# Altium PCB KE_PDB_BMS_ver1.PcbDoc
Units mm, origin at the board's own origin, x right, y up, seen from the top; angles counter-clockwise.
Board outline 60.28 x 59.5 mm, 4 copper layers (L1 [Signal], L2 [GND], L3 [GND], L4 [Power]), stack 1.369 mm thick; 39 components, 28 nets, 158 pads, 35 vias.
Unrouted connection lines stored in the file: 26.
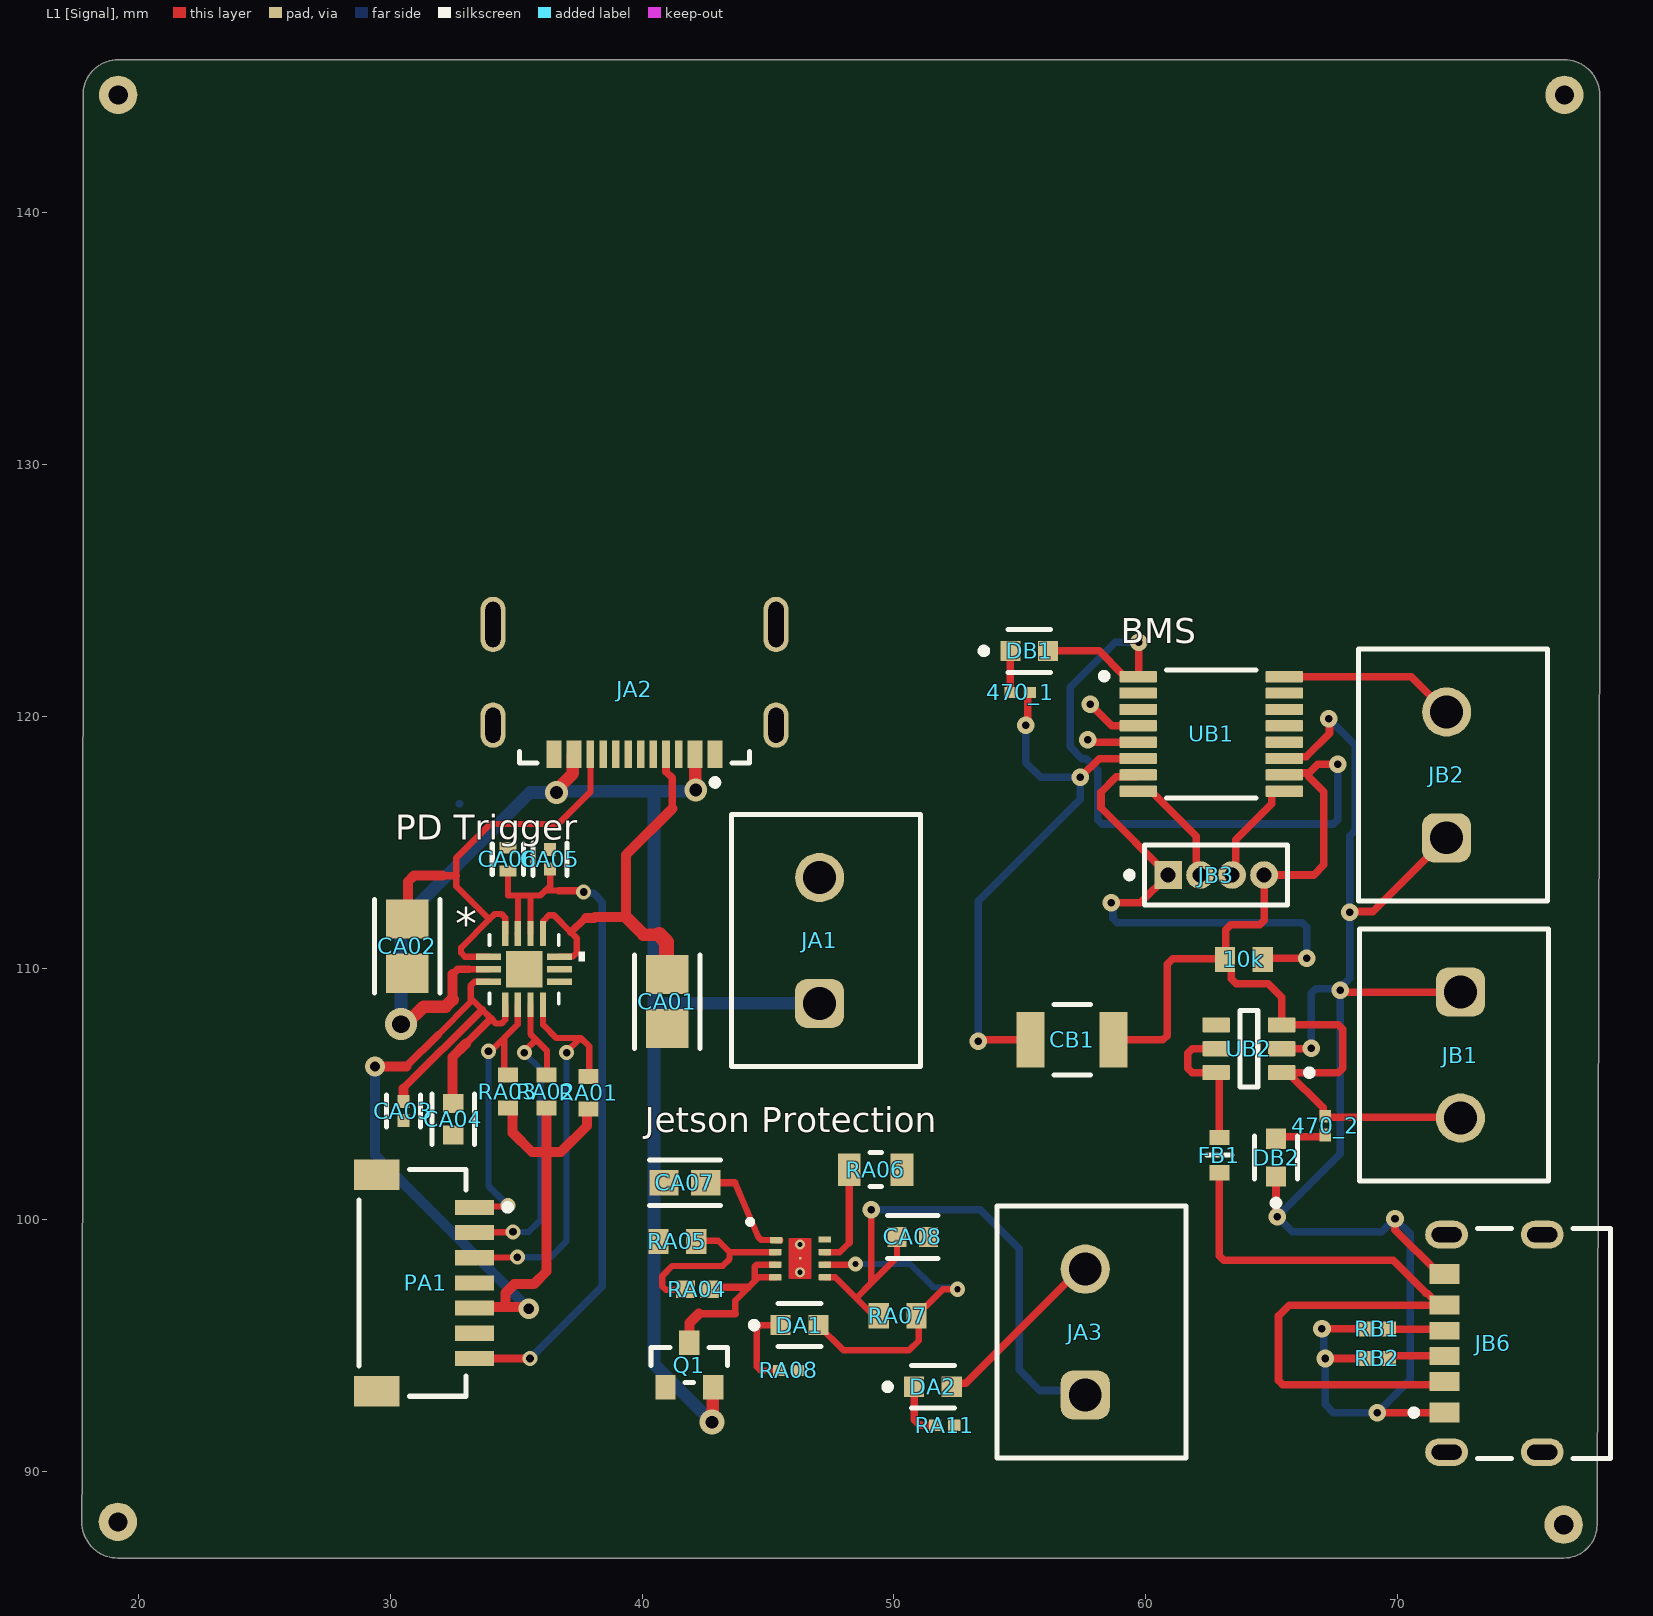
[diagram p0: L1 [Signal] view]
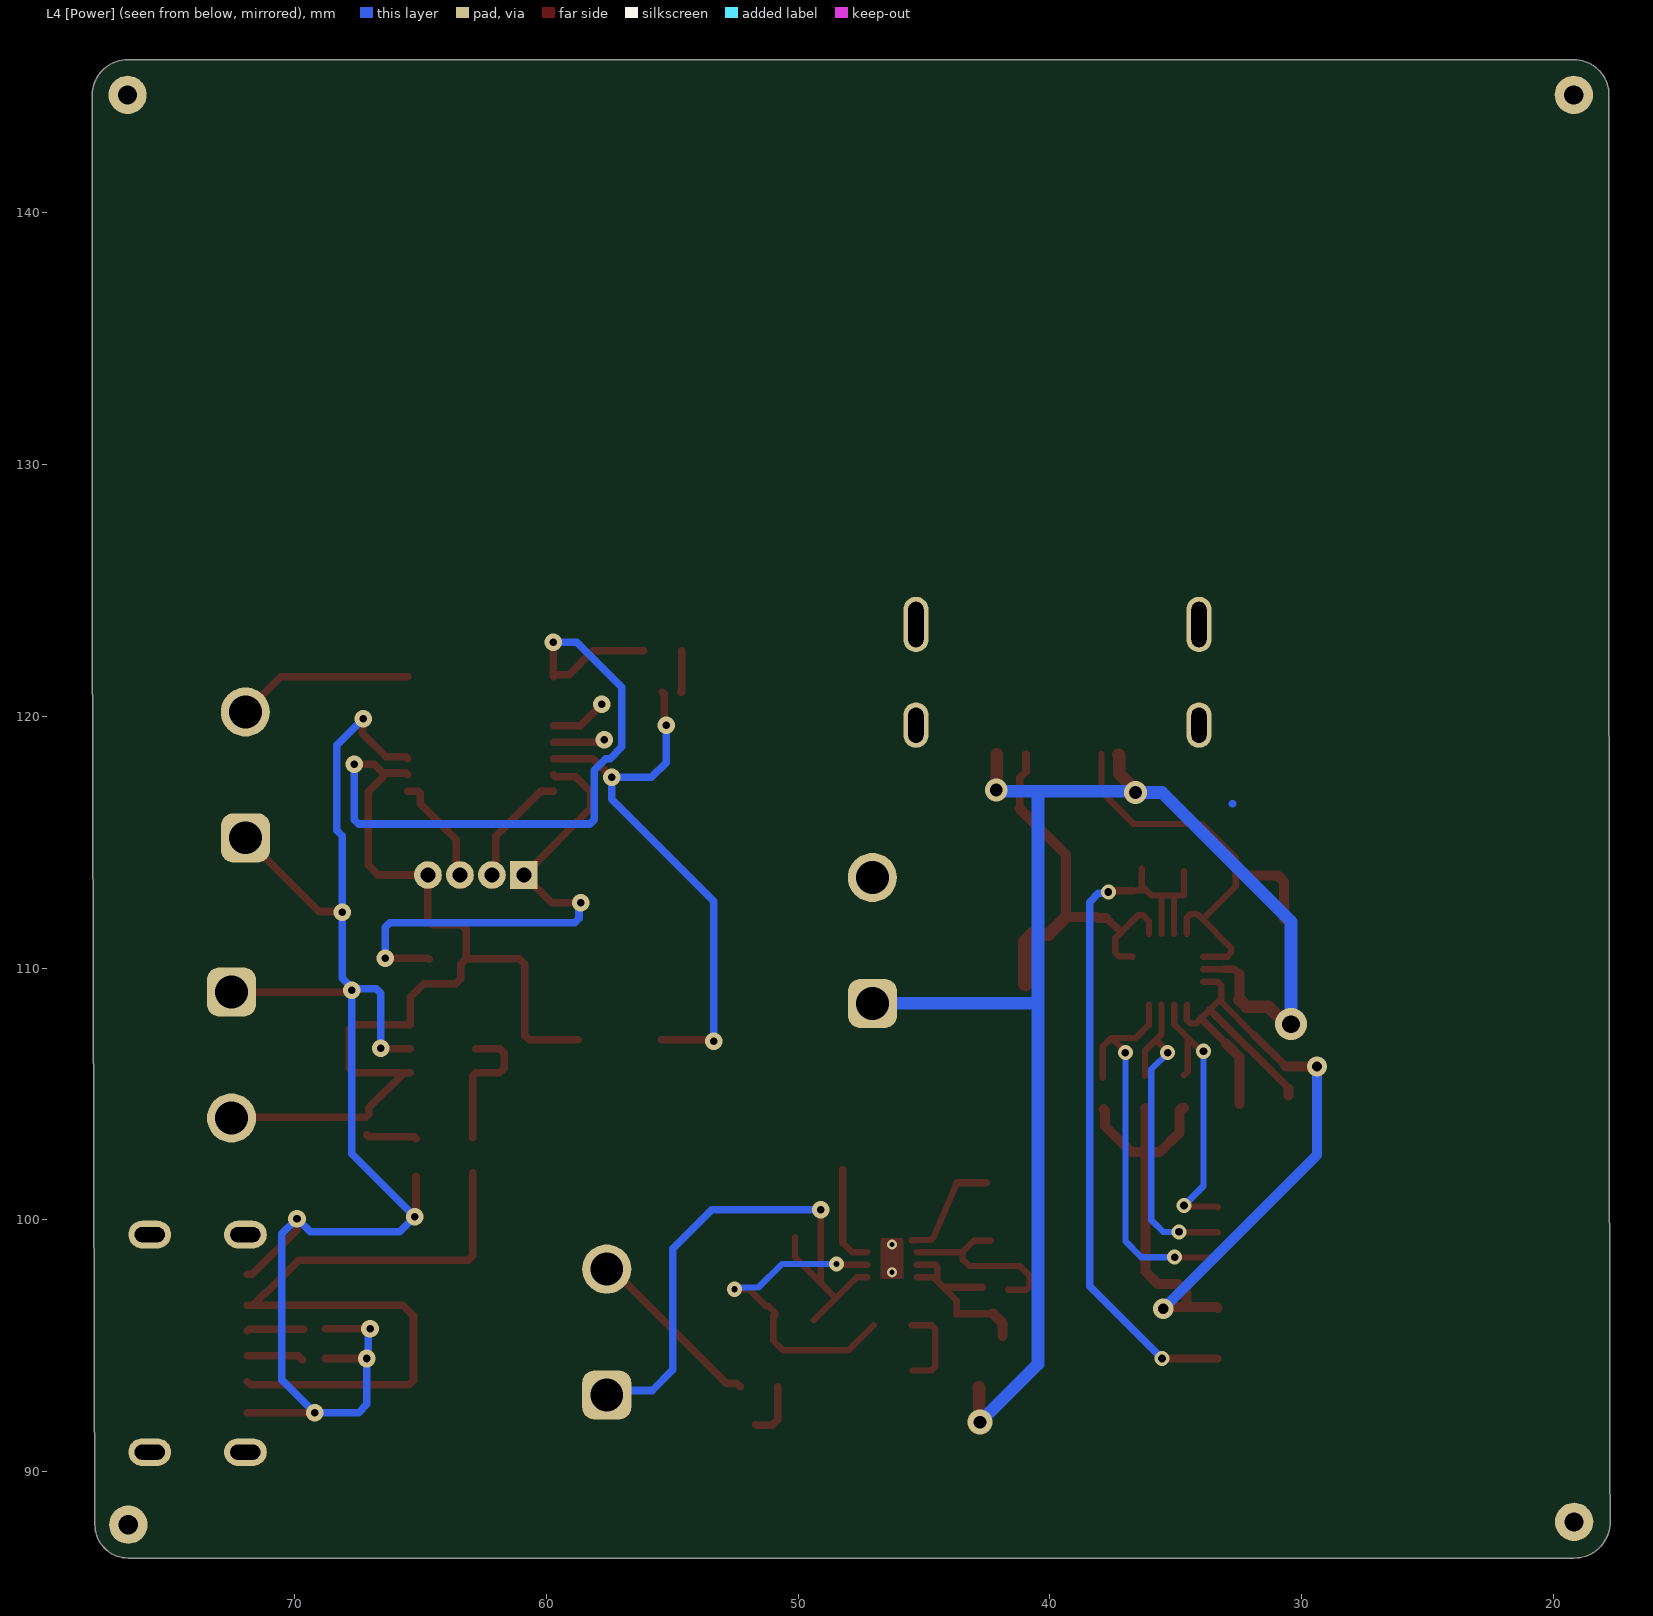
[diagram p1: L4 [Power] view, seen from below]
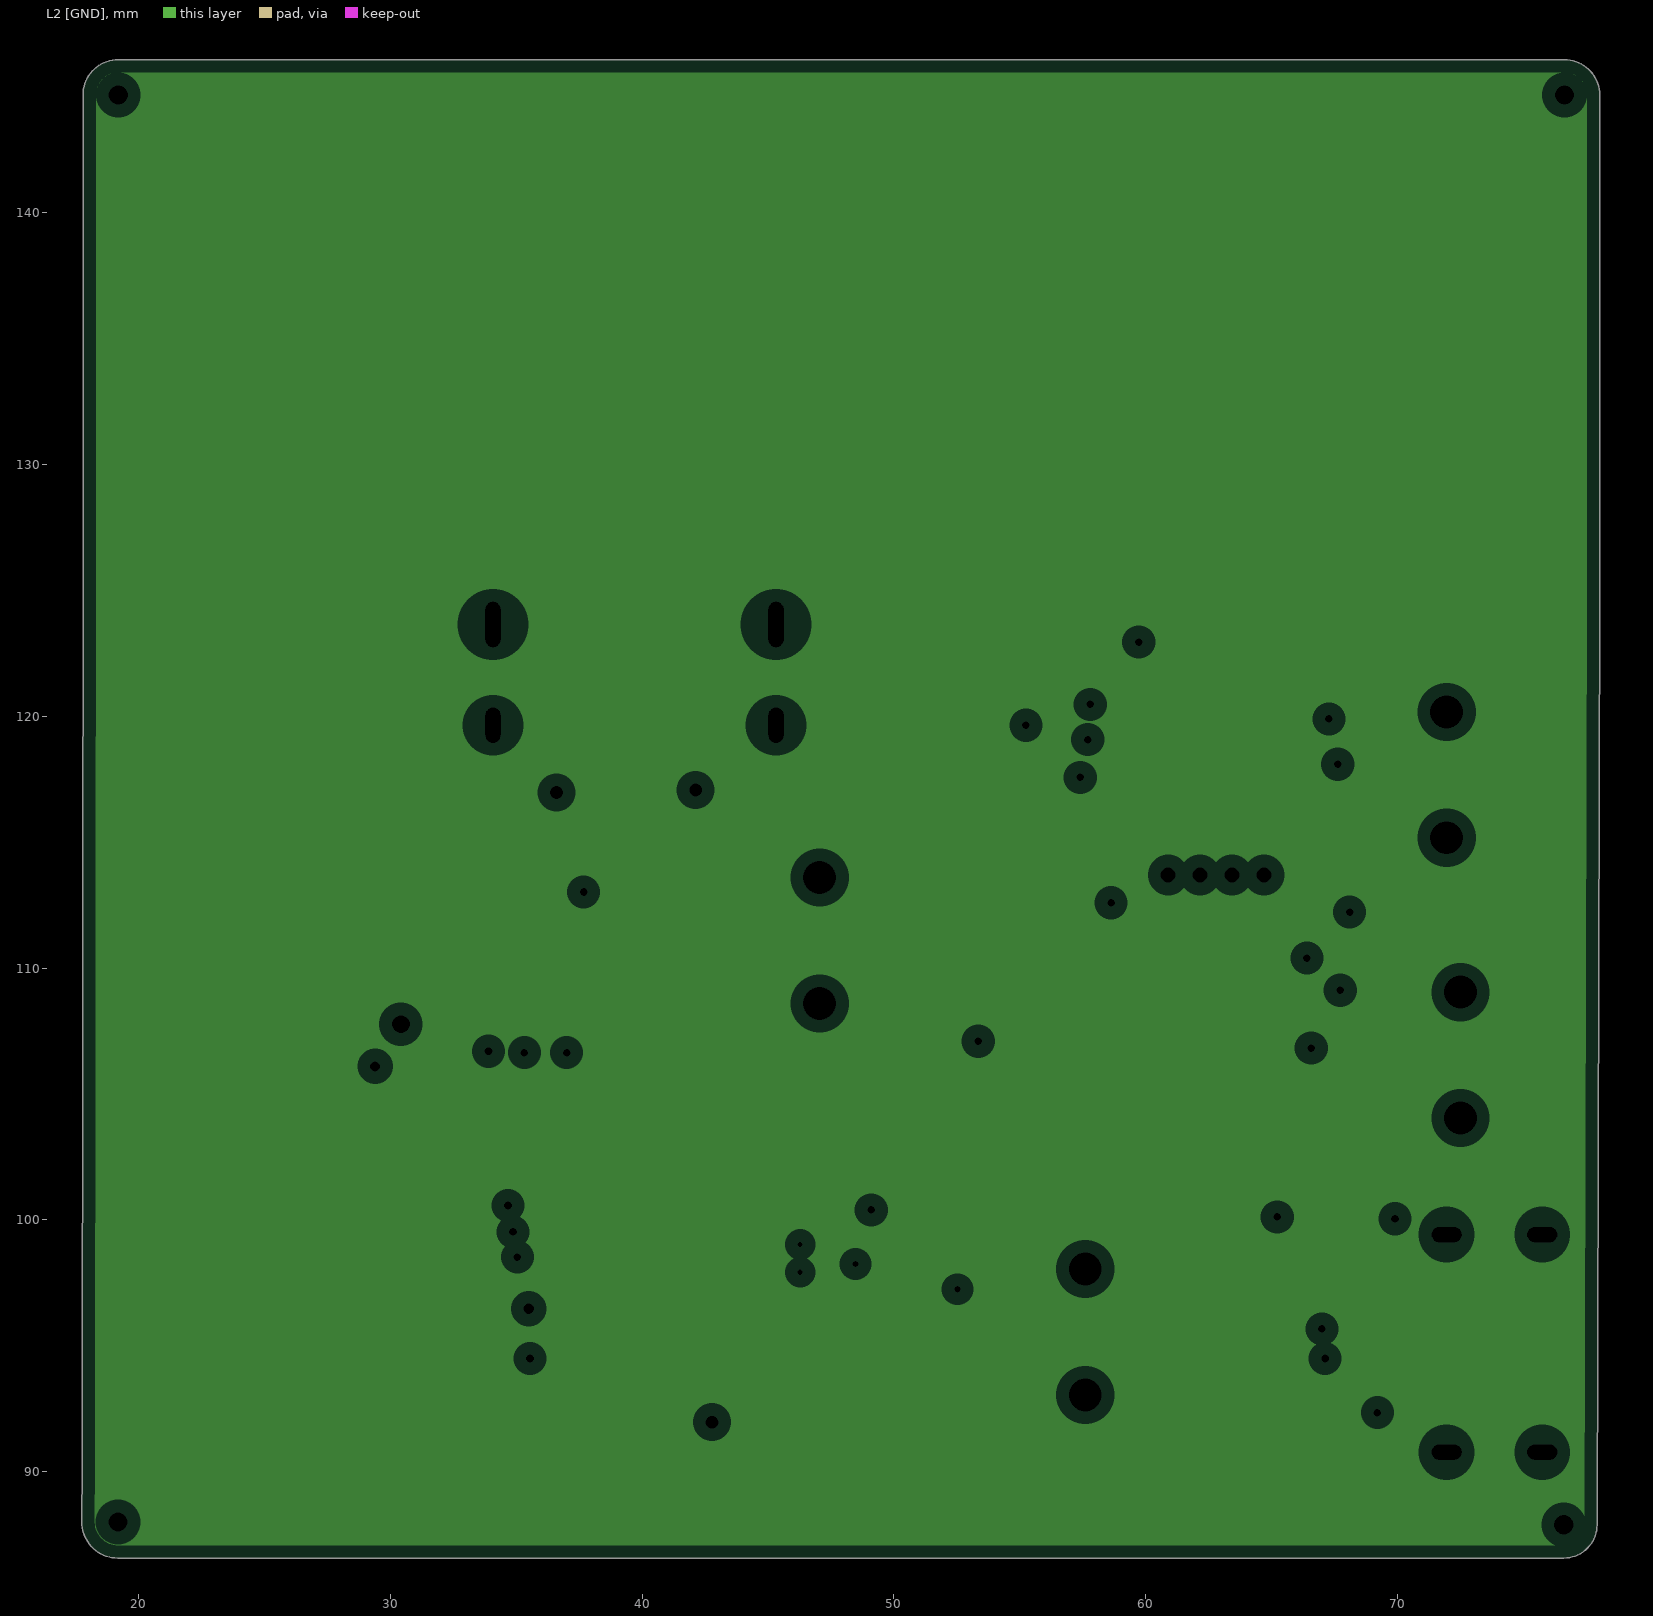
[diagram p2: L2 [GND], clearances drawn from the general rule]
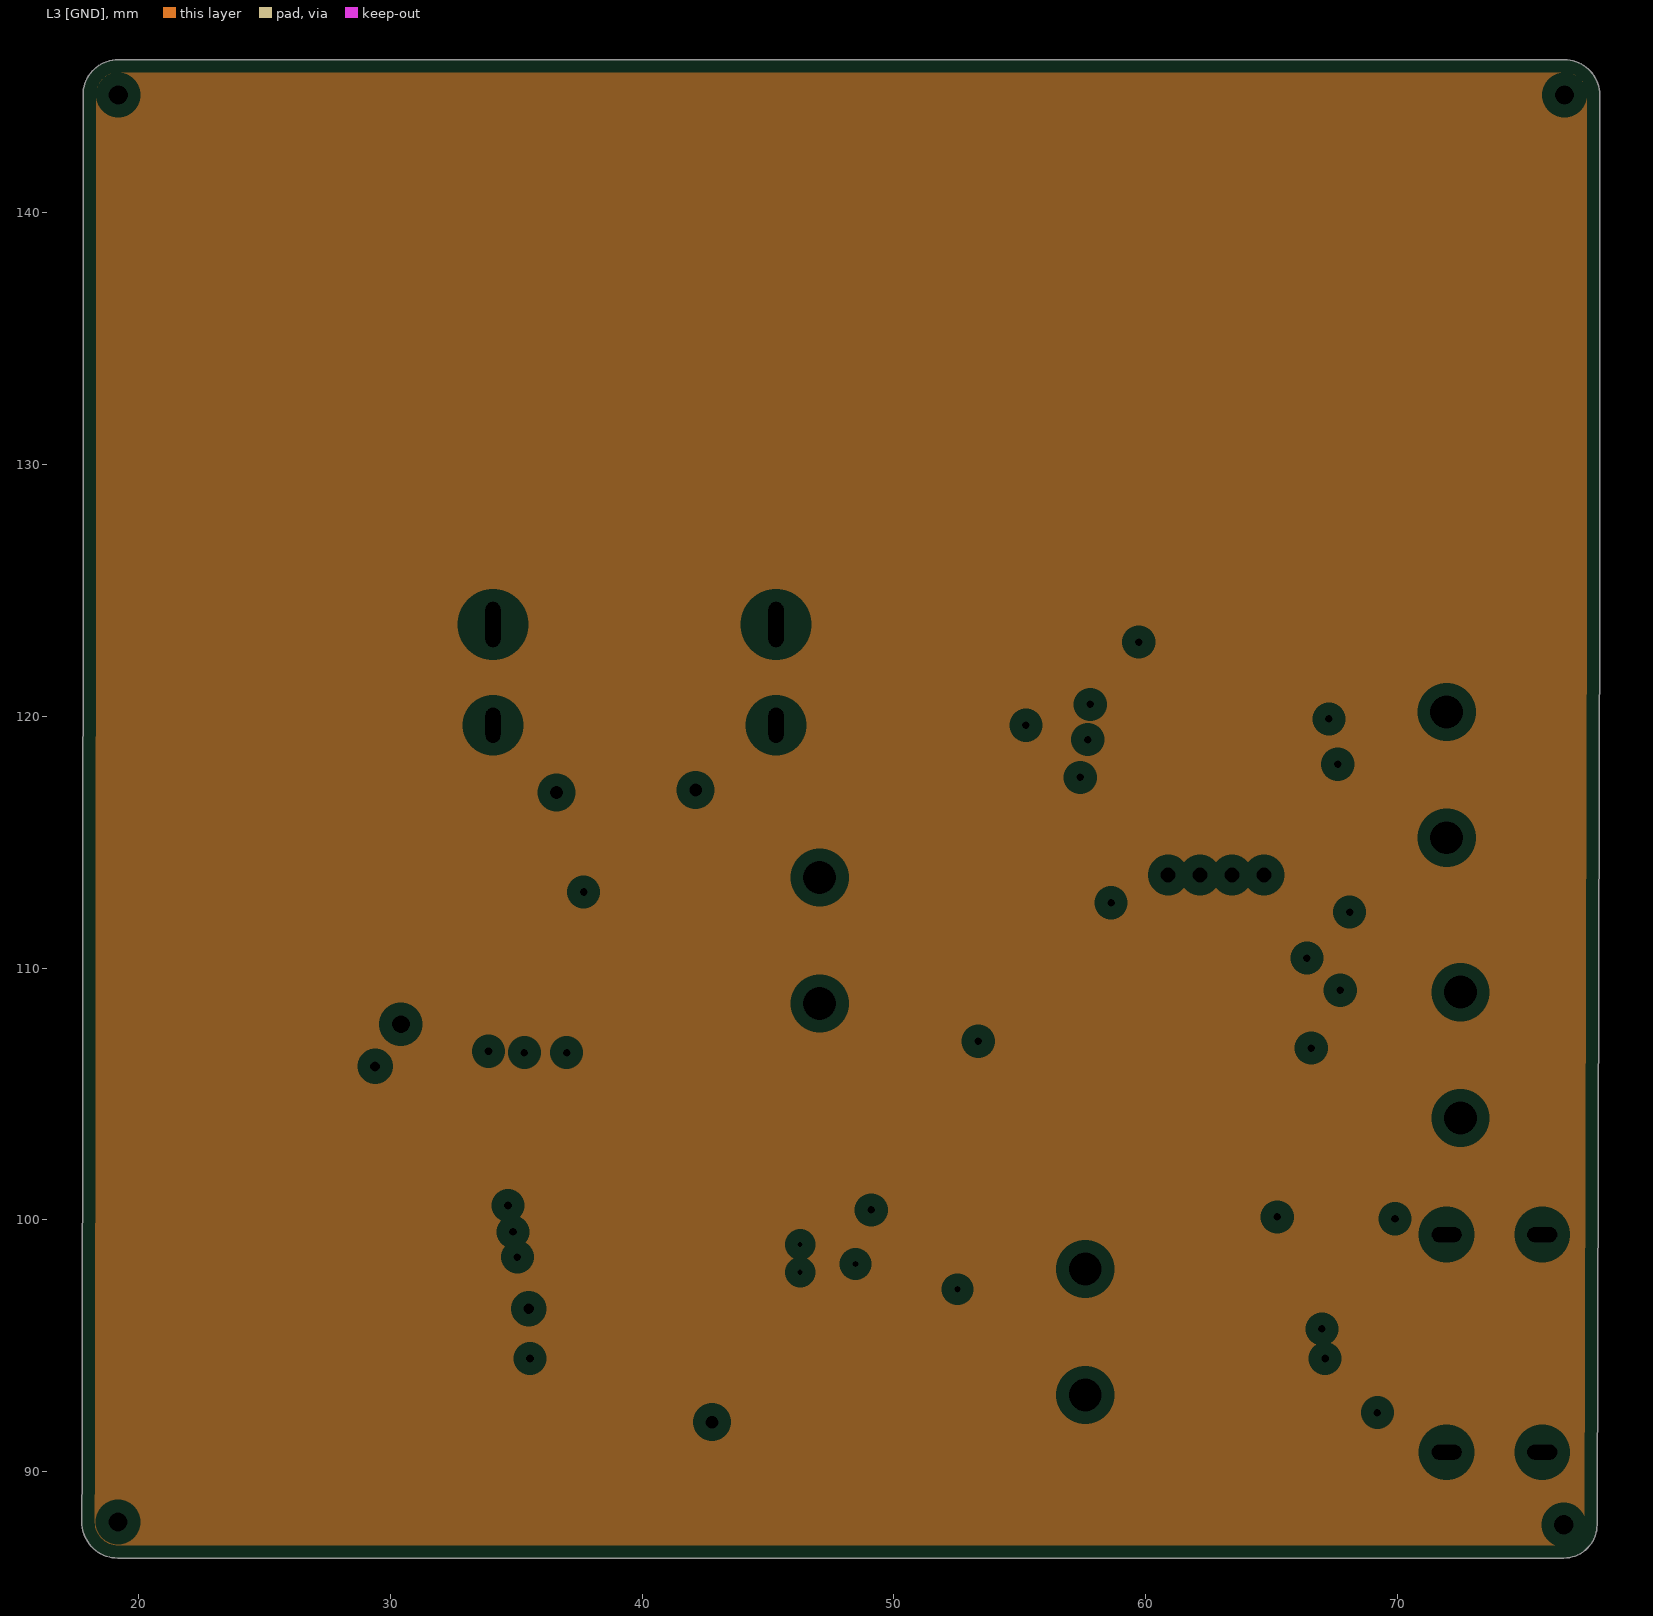
[diagram p3: L3 [GND], clearances drawn from the general rule]
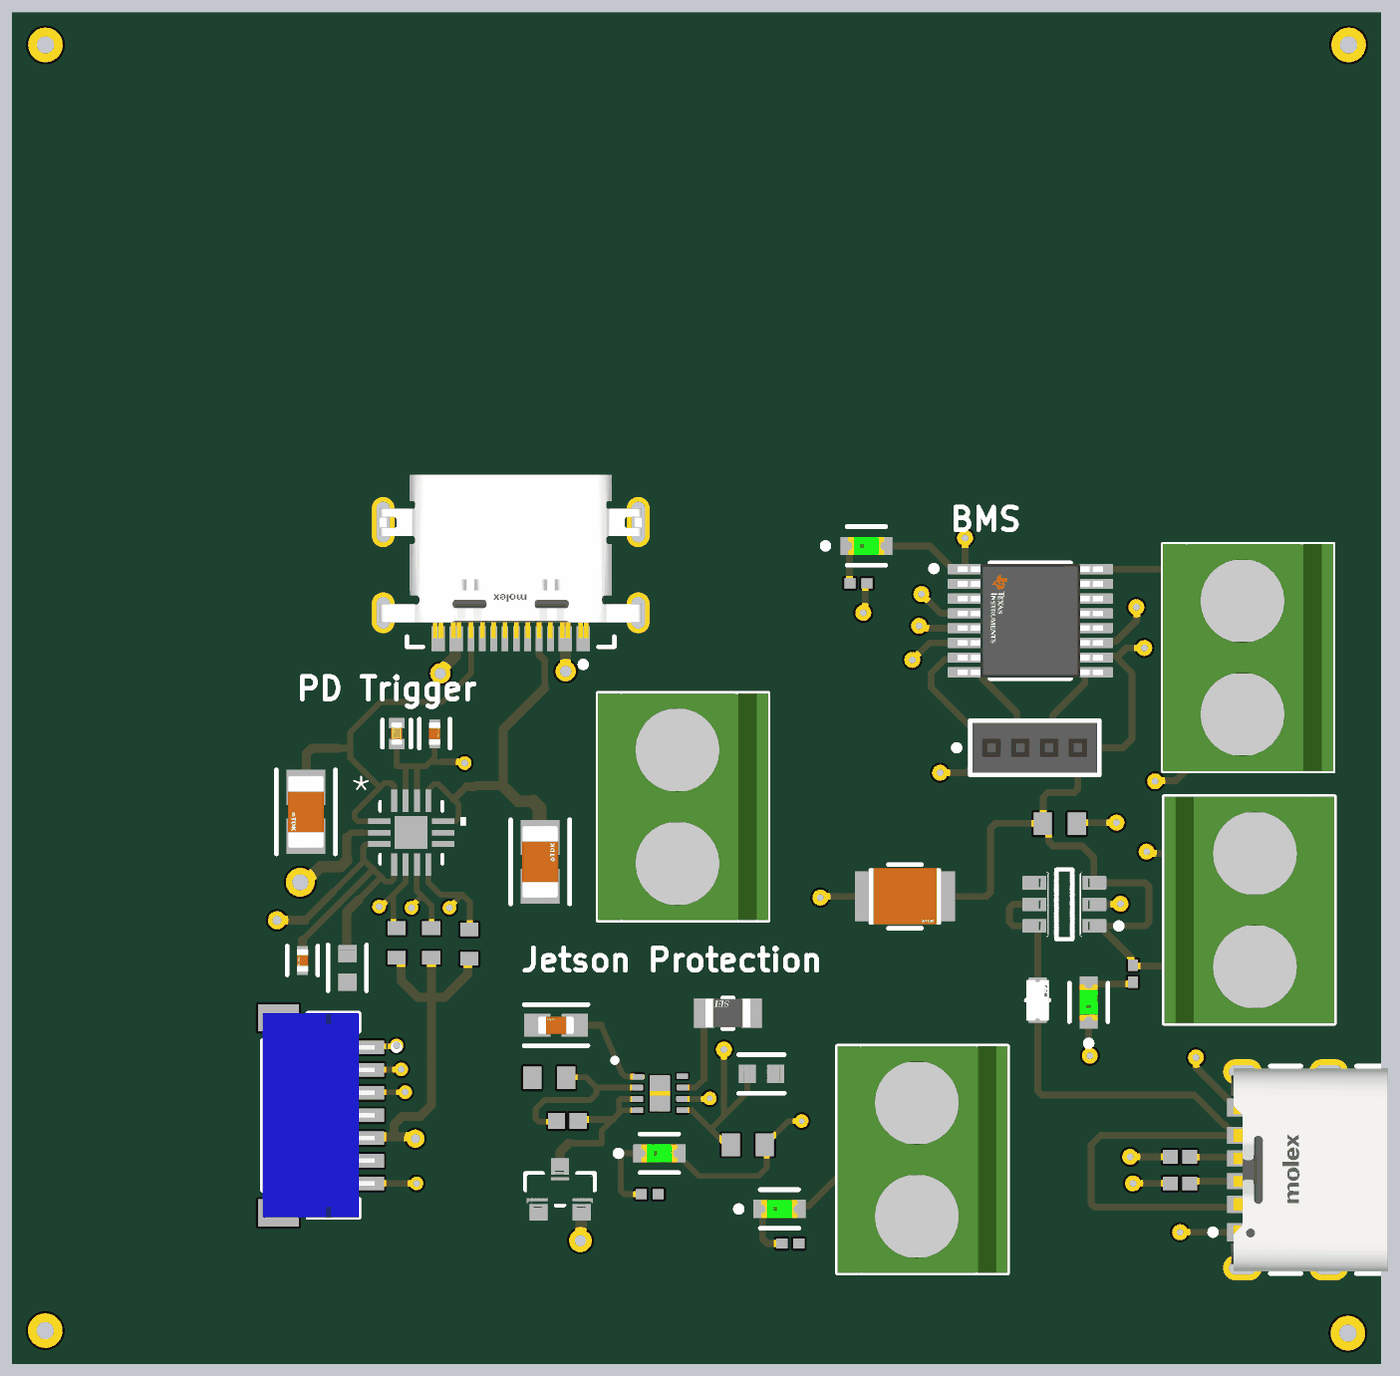
[diagram p4: 3D render of the assembled board from above, using the file's embedded part models]

## Layer stack, top to bottom
Top Solder: solder mask 0.0254, SM-001, Dk 4
L1 [Signal]: signal copper 0.035
Dielectric 1: prepreg 0.1295, PP-017, Dk 4.3
Dielectric 2: prepreg 0.1295, PP-017, Dk 4.3
L2 [GND]: plane copper 0.035
Dielectric 3: core 0.7112, Core-039, Dk 4.8
L3 [GND]: plane copper 0.035
Dielectric 4: prepreg 0.1295, PP-017, Dk 4.3
Dielectric 5: prepreg 0.1295, PP-017, Dk 4.3
L4 [Power]: signal copper 0.035
Bottom Solder: solder mask 0.0254, SM-001, Dk 4

## Board outline
17.747,88.01 17.773,90.177 17.773,90.225 17.798,128.854 17.798,128.855 17.798,144.68 cw(c19.195,144.68) 19.195,146.077 29.35,146.077 29.351,146.077 75.425,146.077 76.63,146.077 cw(c76.63,144.68) 78.027,144.68 78.027,124.53 77.927,87.9 cw(c76.6,87.9) 76.6,86.573 33.1,86.573 19.184,86.573 cw(c19.184,88.01)

## Design rules (kind name [scope] priority, off if disabled: settings)
Clearance [All] p1: gap=0.2 ignorepadtopadclearanceinfootprint=FALSE
PlaneClearance [All] p1: clearance=0.508
PlaneConnect [All] p1: planeconnectstyle=Relief reliefexpansion=0.508 reliefentries=4 reliefconductorwidth=0.254 reliefairgap=0.254
PolygonConnect [All] p1: connectstyle=Direct reliefconductorwidth=0.254 reliefentries=4 polygonreliefangle="90 Angle" airgapwidth=0.254
RoutingVias [All] p1: holewidth=0.711 width=1.27 viastyle="Through Hole" minholewidth=0.711 minwidth=1.27 maxholewidth=0.711 maxwidth=1.27
SolderMaskExpansion [All] p1: expansion=0.102 istentingtop=FALSE
SupplyNets "Schematic Supply Nets" [InNet('GND')] p1: voltage=0.000
UnRoutedNet [All] p1: checkbadconnections=TRUE
Width [All] p1: maxlimit=1 minlimit=0.2 preferedwidth=0.3 minimp=50.000000 maximp=50.000000 favimp=50.000000
27 further rules are at their usual default settings.

## Components (designator, comment, footprint, x,y, rotation, side; value= is the part's Value field where it differs from the comment)
10k "10k" RESC1608X55X25ML10T15 63.9,110.35 r0 top
470_1 "RC0402JR-07470RL" RESC1005X40X25LL05T10 55.025,120.95 r180 top
470_2 "RC0402JR-07470RL" RESC1005X40X25LL05T10 67.125,103.75 r270 top
CA01 "470pF" FP-C3216-085-0_2-IPC_C 41,108.674 r90 top
CA02 "470pF" FP-C3216-085-0_2-IPC_C 30.675,110.875 r270 top
CA03 "0.1uF" FP-CL93-IPC_C 30.525,104.325 r270 top
CA04 "1uF" FP-CL10-IPC_C 32.5,104 r270 top
CA05 "0.1uF" FP-CL93-IPC_C 36.35,114.325 r90 top
CA06 "10uF" FP-CL05A106MP5NUNC-MFG 34.675,114.325 r90 top
CA07 "3.3uF" FP-GRM188-0_1-e0_2_0_5-IPC_A 41.7,101.475 r180 top value=3.3nF
CA08 "1uF" FP-CL10-IPC_C 50.752,99.325 r0 top
CB1 "C3225X5R1E106M250AA" FP-C3225-250-0_4-MFG 57.075,107.15 r0 top
DA1 "LED off = fault" FP-LTST-C190GKT-MFG 46.25,95.825 r0 top
DA2 "LED off=fault" FP-LTST-C190GKT-MFG 51.55,93.375 r0 top
DB1 "LTST-C190GKT" FP-LTST-C190GKT-MFG 55.375,122.6 r0 top
DB2 "LTST-C190GKT" FP-LTST-C190GKT-MFG 65.175,102.475 r90 top
FB1 "3A 6V PTC Fuse" FP-PTSLR06036V300-MFG 62.925,102.575 r270 top
JA1 "691137710002" 691137710002 47.3,111.1 r90 top
JA2 "216990-0001" FP-216990-0001-MFG 39.7,122.5 r180 top
JA3 "691137710002" 691137710002 57.85,95.55 r90 top
JB1 "691137710002" 691137710002 72.25,106.55 r270 top
JB2 "691137710002" 691137710002 72.2,117.675 r90 top
JB3 "LPPB041NFFN-RC" FP-LPPB041NFFN-RC-MFG 62.795,113.7 r0 top
JB6 "217175-0001" FP-217175-0001-MFG 74.9,95.1 r90 top
PA1 "SM07B-SRSS-TB(LF)(SN)" JST-SM07B-SRSS-TB_V 31.4,97.5 r270 top
Q1 "IRLML6402TRPBF" FP-Micro3-MFG 41.875,94.24 r90 top
RA01 "4.7k" RESC1608X55X25LL10T15 37.875,105.05 r90 top value=4.7kOhms
RA02 "4.7k" RESC1608X55X25LL10T15 36.2,105.1 r90 top value=4.7kOhms
RA03 "4.7k" RESC1608X55X25LL10T15 34.675,105.1 r90 top value=4.7kOhms
RA04 "30k" RESC1005X40X25ML10T10 42.2,97.25 r0 top
RA05 "10k" RESC1608X55X25ML10T15 41.4,99.15 r0 top
RA06 "510" FP-RMCF0805-MFG 49.275,102 r180 top value=510R
RA07 "10k" RESC1608X55X25ML10T15 50.15,96.2 r0 top value=10kOhms
RA08 "470" RESC1005X40X25LL05T10 45.825,94.025 r0 top
RA11 "470" RESC1005X40X25LL05T10 52.025,91.85 r0 top
RB1 "5.1k_1" RESC1005X40X25NL10T10 69.2,95.675 r0 top
RB2 "5.1k_2" RESC1005X40X25NL10T10 69.2,94.5 r0 top
UB1 "INA260AIPWR" FP-PW0016A-MFG 62.6,119.3 r0 top
UB2 "TPS22918DBVR" FP-DBV0006A-MFG 64.1,106.8 r180 top

## Footprints (in the part's own frame and the unit in brackets; to place one, negate y for a bottom-side part, rotate by r counter-clockwise, add the part's x,y. Pads: shape width x height; smd on the part's side, far side on the other; paste and mask are expansions set on the pad)
691137710002 [mm] "Horizontal Cable Entry with Pressure Clamp, pitch 5mm, 02p"
  rrect50% 1.95x1.95 hole 1.3: 1(-2.5,0.25)
  round 1.95 hole 1.3: 2(2.5,0.25)
  silkscreen extent -5,-3.75 5,3.75, body extent -5,-3.75 5,3.75, height 11.6
FP-216990-0001-MFG [mm]
  rrect100% 1x1.8 hole 1.4 slot 0.6 at 0 deg paste-2539.97 mask+0: 1(-5.62,2.85) 2(5.62,2.85)
  rrect100% 1x2.2 hole 1.8 slot 0.6 at 0 deg paste-2539.97 mask+0: 3(-5.62,-1.15) 4(5.62,-1.15)
  rect 0.6x1.1 smd paste+0 mask+0: A1-B12(-3.2,4) A4-B9(-2.4,4) A9-B4(2.4,4) A12-B1(3.2,4)
  rect 0.3x1.1 smd paste+0 mask+0: A5(-1.25,4) A6(-0.25,4) A7(0.25,4) A8(1.25,4) B5(1.75,4) B6(0.75,4) B7(-0.75,4) B8(-1.75,4)
  silkscreen extent -4.57,3.9 4.57,5.25, body extent -6.22,-3.45 6.22,4.65, height 0.25
FP-217175-0001-MFG [mm]
  rrect100% 1.1x1.7 hole 1.2 slot 0.6 at 0 deg paste-2539.97 mask+0: 1(-4.32,2.95) 2(4.32,2.95) 3(-4.32,-0.85) 4(4.32,-0.85)
  rect 0.7x1.2 smd paste+0 mask+0: A5(-0.5,3.03) B5(0.5,3.03)
  rect 0.76x1.2 smd paste+0 mask+0: A9(1.52,3.03) B9(-1.52,3.03)
  rect 0.8x1.2 smd paste+0 mask+0: A12(2.75,3.03) B12(-2.75,3.03)
  silkscreen extent -4.57,-3.55 4.57,4.37, body extent -4.97,-3.65 4.97,3.9, height 0.25
FP-C3216-085-0_2-IPC_C [mm]
  rect 1.554x1.706 smd paste+0 mask+0: 1(-1.076,0) 2(1.076,0)
  silkscreen extent -1.85,-1.3 1.85,1.3, body extent -1.95,-1 1.95,1, height 0.25
FP-C3225-250-0_4-MFG [mm]
  rect 1.1x2.2 smd paste+0 mask+0: 1(-1.65,0) 2(1.65,0)
  silkscreen extent -0.72,-1.4 0.72,1.4, body extent -2.3,-1.5 2.3,1.5, height 0.25
FP-CL05A106MP5NUNC-MFG [mm]
  rect 0.45x0.675 smd paste+0 mask+0: 1(-0.463,0) 2(0.463,0)
  silkscreen extent -0.6,-0.63 0.6,0.63, body extent -0.79,-0.45 0.79,0.45, height 0.25
FP-CL10-IPC_C [mm]
  rect 0.758x0.812 smd paste+0 mask+0: 1(-0.627,0) 2(0.627,0)
  silkscreen extent -1.01,-0.85 1.01,0.85, body extent -1.11,-0.55 1.11,0.55, height 0.25
FP-CL93-IPC_C [mm]
  rect 0.515x0.472 smd paste+0 mask+0: 1(-0.379,0) 2(0.379,0)
  silkscreen extent -0.64,-0.67 0.64,0.67, body extent -0.74,-0.38 0.74,0.38, height 0.25
FP-DBV0006A-MFG [mm]
  rrect17% 1.1x0.6 smd paste+0 mask+0: 1(-1.3,0.95) 2(-1.3,0) 3(-1.3,-0.95) 4(1.3,-0.95) 5(1.3,0) 6(1.3,0.95)
  silkscreen extent -2.53,-1.53 0.35,1.53, body extent -1.95,-1.78 1.95,1.78, height 0.25
FP-GRM188-0_1-e0_2_0_5-IPC_A [mm]
  rect 1.159x1.012 smd paste+0 mask+0: 1(-0.827,0) 2(0.827,0)
  silkscreen extent -1.41,-0.91 1.41,0.91, body extent -1.91,-1.01 1.91,1.01, height 0.25
FP-LPPB041NFFN-RC-MFG [mm]
  rect 1.1x1.1 hole 0.6 paste-2539.97 mask+0: 1(-1.905,0)
  round 1.1 hole 0.6 paste-2539.97 mask+0: 2(-0.635,0) 3(0.635,0) 4(1.905,0)
  silkscreen extent -3.56,-1.2 2.84,1.2, body extent -2.94,-1.3 2.94,1.3, height 0.25
FP-LTST-C190GKT-MFG [mm]
  rect 0.8x0.8 smd paste+0 mask+0: 1(-0.75,0) 2(0.75,0)
  silkscreen extent -1.92,-0.85 0.85,0.85, body extent -1.25,-0.55 1.25,0.55, height 0.25
FP-Micro3-MFG [mm]
  rect 0.972x0.802 smd paste+0 mask+0: 1(-0.885,0.95) 2(-0.885,-0.95) 3(0.885,0)
  silkscreen extent -0.7,-1.52 0.7,1.52, body extent -1.47,-1.87 1.47,1.87, height 0.25
FP-PTSLR06036V300-MFG [mm]
  rect 0.6x0.8 smd paste+0 mask+0: 1(-0.7,0) 2(0.7,0)
  silkscreen extent 0,-0.5 0,0.5, body extent -1.1,-0.6 1.1,0.6, height 0.25
FP-PW0016A-MFG [mm]
  rrect22% 1.5x0.45 smd paste+0 mask+0: 1(-2.9,2.275) 2(-2.9,1.625) 3(-2.9,0.975) 4(-2.9,0.325) 5(-2.9,-0.325) 6(-2.9,-0.975) 7(-2.9,-1.625) 8(-2.9,-2.275) 9(2.9,-2.275) 10(2.9,-1.625) 11(2.9,-0.975) 12(2.9,-0.325) 13(2.9,0.325) 14(2.9,0.975) 15(2.9,1.625) 16(2.9,2.275)
  silkscreen extent -4.37,-2.55 1.78,2.55, body extent -3.75,-2.8 3.75,2.8, height 0.25
FP-RMCF0805-MFG [mm]
  rect 0.9x1.3 smd paste+0 mask+0: 1(-1.05,0) 2(1.05,0)
  silkscreen extent -0.23,-0.67 0.23,0.67, body extent -1.6,-0.77 1.6,0.77, height 0.25
JST-SM07B-SRSS-TB_V [mm] "SMD, 7-Leads, Body 9x4.25mm, Pitch 1mm"
  rect 0.6x1.55 smd: 1(-3,1.938) 2(-2,1.938) 3(-1,1.938) 4(0,1.938) 5(1,1.938) 6(2,1.938) 7(3,1.938)
  rect 1.2x1.8 smd: MP1(-4.3,-1.937) MP2(4.3,-1.937)
  silkscreen extent -4.5,-2.64 4.5,3.39, body extent -4.5,-2.64 4.5,2.31, height 2.96
RESC1005X40X25LL05T10 [mm] "Chip Resistor, 2-Leads, Body 1.00x0.50mm, IPC High Density"
  rect 0.5x0.45 smd: 1(-0.375,0) 2(0.375,0)
  body extent -0.53,-0.27 0.53,0.28, height 0.4
RESC1005X40X25ML10T10 [mm] "Chip Resistor, 2-Leads, Body 1.00x0.50mm, IPC Low Density"
  rect 0.75x0.7 smd: 1(-0.475,0) 2(0.475,0)
  body extent -0.55,-0.3 0.55,0.3, height 0.4
RESC1005X40X25NL10T10 [mm] "Chip Resistor, 2-Leads, Body 1.00x0.50mm, IPC Medium Density"
  rect 0.65x0.6 smd: 1(-0.425,0) 2(0.425,0)
  body extent -0.55,-0.3 0.55,0.3, height 0.4
RESC1608X55X25LL10T15 [mm] "Chip Resistor, 2-Leads, Body 1.60x0.80mm, IPC High Density"
  rect 0.6x0.8 smd: 1(-0.65,0) 2(0.65,0)
  body extent -0.85,-0.45 0.85,0.45, height 0.55
RESC1608X55X25ML10T15 [mm] "Chip Resistor, 2-Leads, Body 1.60x0.80mm, IPC Low Density"
  rect 0.8x1 smd: 1(-0.75,0) 2(0.75,0)
  body extent -0.85,-0.45 0.85,0.45, height 0.55

## Part data
10k RA05 RA07: library part CMP-2000-05022-1, "Resistor, 10 KOhm, +/- 5%, 100 mW, -55 to 155 degC, 0603 (1608 Metric), RoHS, Tape and Reel", Case Code - in=0603, Case Code - mm=1608, Manufacturer=Yageo, Operating Temperature Range=-55Cto+155C, Package Description="2-Pin Surface Mount Device, Body 1.6 x 0.8 mm", Package Reference=603, Power Rating=100mW, Resistance=10kOhms, Temperature Coefficient=100PPM/C, Tolerance=5%, Voltage Rating=50V, Datasheet URL=http://www.farnell.com/datasheets/443971.pdf, Datasheet Version="Rev. 4, 04/2009", Manufacturer URL=http://www.yageo.com/, Packaging=Reel, Product=ThickFilmResistorsGeneralPurpose, Series=RC, Termination Style=SMD/SMT
470_1 470_2: library part CMP-1011-00066-2, Manufacturer="Yageo / Phycomp", Part Number=RC0402JR-07470RL
CA01 CA02: library part CMP-08246-003272-1, "Multilayer Ceramic Capacitors 470pF ±5% 630V C0G SMD 1206", Case Code (Imperial)=1206, Case Code (Metric)=3216, Dielectric=C0G, Max Operating Temperature=125°C, Min Operating Temperature=-55°C, Package Quantity=1, Tolerance=5%, Voltage Rating=630V, Capacitance=470pF, Case/Package=1206, Depth=1.6mm, Height=0.85mm, Lead Free="Lead Free", Length=3.2mm, Mount="Surface Mount", Number of Pins=2, Packaging="Tape and Reel", Radiation Hardening=No, RoHS Compliant=Yes, Series=C, Termination=SMD/SMT, Thickness=0.039inch, Voltage Rating (DC)=630V, Weight=0.000571oz, Width=0.063inch
CA03 CA05: library part CMP-13271-000610-1, "Cap Ceramic 100nF 10V X7R ±10% SMD 0402 +125°C Paper T/R"
CA04 CA08: library part CMP-2000-06094-2, "Cap Ceramic 1uF 10V X7R ±10% Pad SMD 0603 +125°C T/R", Case Code (Imperial)=0603, Case Code (Metric)=1608, Dielectric=X7R, Max Operating Temperature=125°C, Min Operating Temperature=-55°C, Package Quantity=1, Tolerance=10%, Voltage Rating=10V, Capacitance=1uF, Case/Package=0603, Contact Plating=Tin, Depth=0.8mm, Height=0.8mm, Lead Free="Lead Free", Length=1.6mm, Mount="Surface Mount", Packaging="Tape and Reel", Radiation Hardening=No, Thickness=0.035inch, Voltage Rating (DC)=10V, Width=0.031inch
CA06: library part CMP-13271-000002-1, "CAP CER 10UF 10V X5R 0402", Manufacturer=Samsung, Manufacturer Part Number=CL05A106MP5NUNC, Temperature="-55°C to +85°C", Temperature Characteristic=X5R, Temperature Coefficient=15%, Temperature Range High=+85°C, Temperature Range Low=-55°C, Tolerance=20%, Voltage Rating=10V, Automotive=No, Capacitance=10uF, Category=Cap, ComponentLink2Description=Datasheet, ComponentLink2URL=http://www.samsungsem.com/kr/support/product-search/mlcc/__icsFiles/afieldfile/2019/05/10/19-CL05A106MP5NUNC.pdf, Device Class L1="Passive Components", Device Class L2=Capacitors, Device Class L3="Ceramic Capacitors", Digikey Description="CAP CER 10UF 10V X5R 0402", Height=0.7mm, Ipc Land Pattern Name=CAPC10050X50, Lead Free=Yes, Material=Ceramic, Octopart=https://octopart.com/cl05a106mp5nunc-samsung-22457395, Package=CL05A106MP5NUNC, RoHS=TRUE
CA07: library part CMP-2006-02467-2, "Chip Multilayer Ceramic Capacitors for General Purpose, 0603, 3300pF, C0G, 30ppm/°C, 5%, 50V", Capacitance=3.3nF, Case Code (Imperial)=0603, Case Code (Metric)=1608, Dielectric=C0G, Max Operating Temperature=125°C, Min Operating Temperature=-55°C, Package Quantity=4000, Tolerance=5%, Voltage=50V, Case/Package=0603, Depth=0.8mm, Height=0.8mm, Lead Free="Lead Free", Length=1.6mm, Material=Ceramic, Mount="Surface Mount", Packaging="Tape and Reel", Radiation Hardening=No, REACH SVHC="No SVHC", Termination=SMD/SMT, Thickness=0.035inch, Voltage Rating=50V, Voltage Rating (DC)=50V, Width=0.031inch
CB1: library part CMP-08246-006012-1, "Multilayer Ceramic Capacitors 10uF ±20% 25V X5R SMD 1210", Capacitance=10uF, Case Code (Imperial)=1210, Case Code (Metric)=3225, Dielectric=X5R, Dielectric Material=Ceramic, Max Operating Temperature=85°C, Min Operating Temperature=-55°C, Package Quantity=1, Tolerance=20%, Voltage=25V, Case/Package=1210, Construction=Flat, Depth=2.5mm, Height=2.5mm, Lead Free="Lead Free", Length=3.2mm, Mount="Surface Mount", Number of Pins=2, Packaging="Tape and Reel", Radiation Hardening=No, REACH SVHC="No SVHC", Resistor Type=Ceramic, RoHS Compliant=Yes, Series=C, Termination=SMD/SMT, Thickness=0.11inch, Voltage Rating=25V, Voltage Rating (DC)=25V, Weight=0.000564oz, Width=0.098inch
DA1 DA2 DB1 DB2: library part CMP-22017-000005-2, "LED GREEN CLEAR CHIP SMD", Case Code (Imperial)=0603, Case Code (Metric)=1608, Color=Green, Forward Current=30mA, Forward Voltage=2.1V, Lens Color=Colorless, Max Operating Temperature=85°C, Min Operating Temperature=-55°C, Package Quantity=1, Power Dissipation=100mW, Reverse Voltage=5V, Test Current=10mA, Voltage=2V, Case/Package=0603, Depth=0.8mm, Dominant Wavelength=569nm, Height=0.8mm, Illumination Color=Green, Lead Free="Lead Free", Length=1.6mm, Lens Style=Clear, Lens Transparency=Clear, Luminous Intensity=6mcd, Mount="Surface Mount", Number of Elements=1, Number of LEDs=1, Number of Pins=2, Packaging="Tape and Reel", Power Rating=100mW, Radiation Hardening=No, Viewing Angle=130°, Wavelength=565nm, Width=0.8mm
FB1: library part CMP-16244-000012-1, "PTC RESET FUSE 3A 6V 0603"
JA1 JA3 JB1 JB2: library part CMP-1502-03324-2, Current Rating=16A, Max Operating Temperature=120°C, Min Operating Temperature=-30°C, Voltage Rating=300V, Contact Material="Nickel, Tin", Height=11.6mm, Lead Pitch=5mm, NexarPartId=78871135, Number of Contacts=2, Number of Pins=2, Number of Rows=1, Packaging=Box, RoHS=Non-Compliant
JA2: library part CMP-04767-000014-1, "CONN RCP USB2.0 TYP C 24P SMD RA"
JB3: library part CMP-25680-000035-1, "CONN HDR 4POS 0.05 GOLD PCB", Package Quantity=1, Connector Type=Header, Contact Plating=Gold, Contact Type="Female Socket", Lead Free="Lead Free", Mount="Through Hole", Number of Positions=4, Number of Rows=1, Packaging=Bulk, Pitch=0.05inch, RoHS Compliant=Yes, Termination=Solder
JB6: library part CMP-04767-000026-1, "CONN RCP USB2.0 C 6+18P SMD RA"
PA1: library part CMP-2000-07081-1, "Male Header, Pitch1 mm, 1 x 7 Position, Height 2.95 mm, -25 to 85 degC, RoHS, Tape and Reel", Manufacturer=JST, Package Description="Male Header, Pitch1 mm, 1 x 7 Position, Height 2.95 mm", Package Reference=SM07B-SRSS-TB, Datasheet URL=http://www.jst-mfg.com/product/pdf/eng/eSH.pdf, Datasheet Version=05/2016, Manufacturer URL=http://www.jst.com/home2.html, Mounting Technology=SurfaceMount, No of Positions=7, Pitch=1mm, Style/Orientation=RightAngleHeader/Plug, Termination=Crimp, Type=ShroudedHeader
Q1: library part CMP-32901-000130-1, "MOSFET P-CH 20V 3.7A SOT-23", Continuous Drain Current=-3.7A, Drain To Source Breakdown Voltage=-20V, Drain To Source Resistance=0.05Ω, Gate To Source Voltage=12V, Input Capacitace At Vds="633pF @ -10V", Manufacturer=Infineon, Max Forward Diode Voltage=-1.2V, Max Junction Temp=+150°C, Package=Micro3, Power Dissipation=1.3W, Pulse Drain Current=-22A, Temperature="-55°C to +150°C", Temperature Range Low=-55°C, Automotive=No, Category=Trans, ComponentLink2Description=Datasheet, ComponentLink2URL=https://www.infineon.com/dgdl/irlml6402pbf.pdf?fileId=5546d462533600a401535668d5c2263c, Depletion Mode=False, Device Class L1="Discrete Semiconductors", Device Class L2=Transistors, Device Class L3=MOSFETs, Digikey Description="MOSFET P-CH 20V 3.7A SOT-23", Drain To Source Voltage=-20V, Footprint Url=http://irf.com/package/outline/po_micro3.pdf, Gate Charge At Vgs="8nC @ -5V", Height=1.12mm, Ipc Land Pattern Name=SOT95P237X100-3, Lead Free=Yes, Manufacturer Part Number=IRLML6402TRPBF, Number Of Channels=1, Number Of P Channels=1, Octopart=https://octopart.com/irlml6402trpbf-infineon-65874989, Reverse Recovery Charge=11nC, Reverse Recovery Time=29ns, RoHS=TRUE, Rthja Max=75°C/W, Standoff Height=0.01mm, Technology=MOSFET, Temperature Range High=+150°C, Threshold Vgs=-0.55V, Threshold Vgs Max=-1.2V, Threshold Vgs Min=-0.4V, Turn Off Delay Time=588ns, Turn On Delay Time=350ns
RA01 RA02 RA03: library part CMP-2000-06942-1, "Chip Resistor, 4.7 KOhm, +/- 1%, 0.1 W, -55 to 155 degC, 0603 (1608 Metric), RoHS, Tape and Reel", Case Code - in=0603, Case Code - mm=1608, Manufacturer=Yageo, Operating Temperature Range=-55Cto+155C, Package Description="2-Pin Surface Mount Device, Body 1.6 x 0.8 mm", Power Rating=100mW, Resistance=4.7kOhms, Temperature Coefficient=100PPM/C, Tolerance=1%, Voltage Rating=50V, Datasheet URL=http://www.yageo.com/documents/recent/PYu-RC_Group_51_RoHS_L_7.pdf, Datasheet Version="Rev. 7, 05/2017", Manufacturer URL=http://www.yageo.com/, Mounting Technology=SurfaceMount, Package Reference=0603, Packaging=Reel, Product=ThickFilmResistorsGeneralPurpose, Series=RC, Termination Style=SMD/SMT
RA04: library part CMP-2002-05800-1, Manufacturer=Panasonic, Part Number=ERA-2AEB303X
RA06: library part CMP-26527-004489-1, "510Ω ±5% 0.125W 0805 Thick Film Chip Resistor AEC-Q200 compliant", Case Code (Imperial)=0805, Case Code (Metric)=2012, Max Operating Temperature=155°C, Max Power Dissipation=125mW, Min Operating Temperature=-55°C, Resistance=510R, Resistor Type="Thick Film", Temperature Coefficient=200ppm/°C, Tolerance=5%, Case/Package=0805, Construction=Rectangular, Contact Plating=Tin, Depth=1.25mm, Features="Automotive AEC-Q200", Height=0.026inch, Lead Free="Lead Free", Length=0.079inch, Military Standard=Not, Mount="Surface Mount", Number of Terminations=2, Packaging="Tape and Reel", Power Rating=125mW, Radiation Hardening=No, RoHS Compliant=Yes, Series=RMCF, Size Code=0805, Width=0.049inch
RA08 RA11: library part CMP-1011-00066-2, Manufacturer="Yageo / Phycomp", Part Number=RC0402JR-07470RL
RB1 RB2: library part CMP-2002-05812-1, "ERA-2AEB512X", Manufacturer=Panasonic, Part Number=ERA-2AEB512X
UB1: library part CMP-04910-000015-1, "IC MONITOR PWR/CURR 16TSSOP", Ambient Temperature Range High=+125°C, Ambient Temperature Range Low=-40°C, Manufacturer="Texas Instruments", Max Junction Temp=+150°C, Max Supply Voltage=5.5V, Min Supply Voltage=2.7V, Nominal Supply Current=310uA, Output Current=10mA, Package=PW0016A, Temperature="-40°C to +125°C", Automotive=No, Category=IC, ComponentLink2Description=Datasheet, ComponentLink2URL=http://www.ti.com/lit/ds/symlink/ina260.pdf, Device Class L1="Integrated Circuits (ICs)", Device Class L2="Power Management ICs", Device Class L3=unset, Digikey Description="IC MONITOR PWR/CURR 16TSSOP", Height=1.2mm, Lead Free=Yes, Manufacturer Part Number=INA260AIPWR, Octopart=https://octopart.com/ina260aipwr-texas+instruments-75199489, RoHS=TRUE, Standoff Height=0.05mm, Temperature Range High=+125°C, Temperature Range Low=-40°C
UB2: library part CMP-04910-000024-2, "IC SINGLE CHANNEL LOAD SWITCH", Ambient Temperature Range High=105°C, Case/Package=SOT-23, Manufacturer Lifecycle Status=ACTIVE, Max Junction Temperature (Tj)=125°C, Max Output Current=2A, Max Supply Voltage=5.5V, Min Operating Temperature=-40°C, Min Supply Voltage=1V, Fall Time=2µs, Height=1.45mm, Interface=On/Off, Lead Free="Lead Free", Length=2.9mm, Lifecycle Status=Production, Max Operating Temperature=105°C, NexarPartId=71360943, Number Of Channels=1, Number of Drivers=1, Number of Outputs=1, Number of Pins=6, Output Configuration="High Side", Output Current=2A, Rise Time=2.54ms, RoHS=Compliant, Schedule B="8542390000, 8542390000", Thickness=1.2mm, Turn-Off Delay Time=2µs, Turn-On Delay Time=1.95ms, Width=1.6mm

## Free pads (board coordinates)
  rect 0.991x0.254 smd paste+0 mask+0: 1(33.906,110.459) 2(33.906,109.959) 3(33.906,109.459) 8(36.728,109.459) 9(36.728,109.959) 10(36.728,110.459)
  rrect25% 0.5x0.25 smd mask+0: 1(45.324,99.2) 2(45.29,98.724) 3(45.29,98.224) 4(45.29,97.724) 5(47.26,97.724) 6(47.25,98.225) 7(47.26,98.724) 8(47.26,99.224)
  rect 0.254x0.991 smd paste+0 mask+0: 4(34.567,108.548) 5(35.067,108.548) 6(35.567,108.548) 7(36.067,108.548) 11(36.067,111.37) 12(35.567,111.37) 13(35.067,111.37) 14(34.567,111.37)
  rect 0.1x0.1 smd paste-1 mask+0: 9(46.275,98.474)
  round 0.4 hole 0.2 mask+0: 10(46.275,99.024) 11(46.275,97.924)
  rect 1.448x1.448 smd paste+0 mask+0: 15(35.317,109.959)
  round 1.524 hole 0.762: 16(19.195,144.68) 17(76.63,144.68) 18(19.184,88.01) 19(76.6,87.9)

## Via types
v1: diameter 0.7, hole 0.3, L1 [Signal] to L4 [Power], 19 vias
v2: diameter 0.6, hole 0.3, L1 [Signal] to L4 [Power], 8 vias
v3: diameter 0.6, hole 0.25, L1 [Signal] to L4 [Power], 2 vias
v4: diameter 0.9, hole 0.5, L1 [Signal] to L4 [Power], 2 vias
v5: diameter 0.8, hole 0.4, L1 [Signal] to L4 [Power], 2 vias
v6: diameter 1, hole 0.5, L1 [Signal] to L4 [Power], 1 vias
v7: diameter 1.27, hole 0.711, L1 [Signal] to L4 [Power], 1 vias

## Nets (pads, with @x,y where several pads share a name; then routed paths per layer and width w, separated by ;. In a path a pad name is that pad's centre, name@x,y a point inside that pad or via, vN(x,y) a via of type N, cw(c..) or ccw(c..) an arc to the next point about the centre after c; other vN are vias at no path point)
GND: 470_1.1 CA01.1 CA02.2 CA03.2 CA04.2 CA05.2 CA06.2 CA07.2 CA08.2 CB1.1 DB2.1 JA1.2 JA2.A1-B12 JA2.A12-B1 JB1.1 JB2.1 JB6.A12 JB6.B12 PA1.4 pad.8 pad.9@36.728,109.959 Q1.1 RA05.1 RA06.1 RA08.2 RA11.2 RB1.1 RB2.1 UB1.4 UB1.5 UB1.6 UB1.11 UB2.2 | length 94.9
  L1 [Signal] w0.3: v1(53.35,107.1) 53.4,107.15 CB1.1 ; v1(55.24,119.65) 55.32,119.73 55.32,120.875 55.395,120.95 470_1.1 ; v1(57.4,117.575) 58.15,118.325 UB1.6 ; 57.7,119.075 57.8,118.975 UB1.5 ; 57.8,120.475 58.65,119.625 UB1.4 ; DB2.1 65.175,100.175 v1(65.225,100.125) ; UB2.2 66.55,106.8 v1(66.575,106.825) ; UB1.11 65.575,118.4 66.366,118.4 67.3,119.334 67.3,119.85 67.275,119.875 v1(67.275,119.9) ; v1(67,95.675) RB1.1 ; v1(67.125,94.5) RB2.1 ; v1(67.725,109.125) 67.8,109.05 JB1.1 ; v1(68.1,112.225) 68.125,112.25 69.025,112.25 JB2.1 ; v1(69.2,92.35) JB6.B12 ; v1(69.9,100.05) 69.9,99.62 71.67,97.85 JB6.A12
  L4 [Power] w0.3: v1(53.35,107.1) 53.35,112.65 57.4,116.7 v1(57.4,117.575) 55.825,117.575 55.24,118.16 v1(55.24,119.65) ; v1(66.575,106.825) 66.575,108.999 66.751,109.175 67.675,109.175 v1(67.725,109.125) ; v1(67,95.675) 67.062,95.613 67.062,94.563 v1(67.125,94.5) 67.125,92.675 67.45,92.35 v1(69.2,92.35) 70.5,93.65 70.5,99.45 v1(69.9,100.05) 69.375,99.525 65.825,99.525 v1(65.225,100.125) 67.725,102.625 v1(67.725,109.125) ; v1(67.275,119.9) 68.325,118.85 68.325,115.474 68.1,115.249 v1(68.1,112.225) 68.1,109.608 67.725,109.233 v1(67.725,109.125)
Net10k_1: 10k.1 470_2.1 CA05.1 CA06.1 CB1.2 DB1.2 JB1.2 JB3.4 PA1.7 pad.12 pad.13 UB1.1 UB1.10 UB2.1 UB2.3 | length 96.2
  L1 [Signal] w0.25: CA06.1 34.675,112.888 35.025,112.888 ; pad.13 35.069,111.372 35.069,112.844 35.025,112.888 ; pad.12 35.569,111.372 35.569,112.813 35.494,112.888 ; CA05.1 36.35,113.275 36.157,113.082 ; 36.7,113.075 36.694,113.082 36.157,113.082 ; 35.025,112.888 35.494,112.888 ; 35.494,112.888 35.963,112.888 36.157,113.082
  L1 [Signal] w0.3: PA1.7 v2(35.55,94.5) ; 36.694,113.082 37.618,113.082 v2(37.675,113.025) ; DB1.2 58.148,122.6 59.098,121.65 59.625,121.65 UB1.1 59.725,121.6 v1(59.725,122.95) ; CB1.2 60.674,107.15 60.85,107.326 60.85,110.15 61.075,110.375 10k.1@63.175,110.375 ; UB2.1 65.65,105.85 67.05,104.45 67.05,104.2 470_2.1 67.162,104.088 72.462,104.088 JB1.2 ; UB1.10 65.575,117.75 66.475,117.75 66.825,118.1 v1(67.625,118.1) ; UB2.1@65.8,105.85 67.649,105.85 67.825,106.026 67.825,107.574 67.649,107.75 UB2.3 65.4,108.85 64.875,109.375 63.6,109.375 63.4,109.575 63.4,110.15 10k.1@63.175,110.375 ; 66.475,117.6 67.075,117 67.075,114.1 66.675,113.7 JB3.4 64.7,111.901 64.524,111.725 63.375,111.725 63.175,111.525 10k.1@63.175,110.375
  L4 [Power] w0.3: v2(35.55,94.5) 38.425,97.375 38.425,112.625 38.08,112.97 37.73,112.97 v2(37.675,113.025) ; v1(59.725,122.95) 58.8,122.95 57,121.15 57,118.785 57.46,118.325 57.64,118.325 58.1,117.865 58.1,115.901 58.276,115.725 67.449,115.725 67.625,115.901 v1(67.625,118.1)
Net10k_2: 10k.2 JB3.1 UB1.7 | length 20.5
  L1 [Signal] w0.3: v1(58.625,112.6) 59.79,112.6 JB3.1 58.225,116.365 58.225,116.991 58.834,117.6 59.625,117.6 UB1.7 ; 10k.2 64.7,110.4 v1(66.4,110.4)
  L4 [Power] w0.3: v1(58.625,112.6) 58.702,112.523 58.702,111.976 58.877,111.8 66.224,111.8 66.4,111.624 v1@66.4,110.302
Net470_1_2: 470_1.2 DB1.1 | length 1.7
  L1 [Signal] w0.3: DB1.1 54.625,120.95 470_1.2
Net470_2_2: 470_2.2 DB2.2 | length 2
  L1 [Signal] w0.3: DB2.2 65.25,103.3 67.05,103.3 470_2.2
NetCA01_2: CA01.2 JA2.A5 pad.10@36.728,110.459 pad.11@36.067,111.37 | length 17.1
  L1 [Signal] w0.25: pad.11@36.067,111.37 36.069,111.372 36.069,111.869 36.296,112.096 36.504,112.096 37.175,111.425 37.4,111.2 37.4,110.607 37.254,110.461 36.73,110.461 pad.10@36.728,110.459
  L1 [Signal] w0.3: 37.175,111.425 37.74,111.99 37.775,111.99 ; JA2.A5 40.95,117.805 41.2,117.555 41.2,116.335
  L1 [Signal] w0.4: 37.775,111.99 38.104,111.99 38.139,112.025 39.365,112.025 39.365,114.5 41.2,116.335
  L1 [Signal] w0.5: 39.365,112.025 40.058,111.333 40.682,111.333
  L1 [Signal] w0.6: 40.682,111.333 40.975,111.04 CA01.2@40.975,109.375
NetCA02_1: CA02.1 JA2.B5 pad.1@33.906,110.459 pad.14 | length 19.1
  L1 [Signal] w0.25: pad.1@33.906,110.459 32.959,110.459 32.813,110.605 32.813,110.813 33.938,111.938 ; pad.14@34.567,111.738 pad.14 34.565,111.372 34.565,112.006 34.419,112.153 34.153,112.153 33.938,111.938 ; JA2.B5 37.95,117 36.675,115.725 33.975,115.725 32.625,114.375 32.625,113.675 32.625,113.25 33.938,111.938
  L1 [Signal] w0.3: 32.075,113.675 32.625,113.675
  L1 [Signal] w0.4: CA02.1@30.7,111.951 30.7,113.441 30.935,113.675 32.075,113.675
NetCA03_1: CA03.1 CA04.1 PA1.5 pad.3@33.906,109.459 pad.4@34.567,108.548 RA01.1 RA02.1 RA03.1 | length 46.2
  L1 [Signal] w0.25: 31.9,107.362 33.2,108.662 33.2,108.8 ; pad.3@33.906,109.459 33.904,109.457 33.346,109.457 33.2,109.311 33.2,108.8 ; pad.4@34.567,108.548 34.565,108.546 34.565,107.946 34.419,107.8 34.2,107.8 34,108 33.65,108.35 33.2,108.8
  L1 [Signal] w0.3: 30.525,105.225 33.65,108.35 ; 30.638,106.1 31.9,107.362 ; 33,107 34,108
  L1 [Signal] w0.4: v5(29.4,106.1) 30.638,106.1 ; CA03.1@30.525,104.95 30.525,105.225 ; CA04.1@32.475,104.605 32.475,106.475 33,107 ; PA1.5 33.388,96.55 34.569,96.55 ; RA03.1 34.762,104.45 34.862,104.35 34.862,103.463 35.625,102.7 36.2,102.7 36.2,97.95 35.7,97.45 34.925,97.45 34.569,97.094 34.569,96.55 ; v5(35.5,96.475) 35.425,96.55 34.569,96.55 ; RA02.1 36.2,102.838 36.338,102.7 36.775,102.7 37.809,103.734 37.809,104.334 RA01.1
  L4 [Power] w0.4: v5@29.4,106.025 29.4,102.575 v5(35.5,96.475)
NetCA07_1: CA07.1 pad.1@45.324,99.2 | length 4.4
  L1 [Signal] w0.25: 43.688,101.475 44.617,99.322 44.721,99.219 45.324,99.2 pad.1@45.498,99.2
  L1 [Signal] w0.3: CA07.1 43.688,101.475
NetCA08_1: CA08.1 JA3.1 pad.5@47.26,97.724 RA07.1 | length 23.5
  L1 [Signal] w0.25: pad.5@47.26,97.724 47.675,97.724 48.5,96.899 ; v1(49.1,100.4) 49.1,97.498 ; RA07.1@49.375,96.025 48.501,96.899 49.1,97.498 ; CA08.1 50.125,98.523 49.475,97.873 49.1,97.498
  L4 [Power] w0.25: JA3.1@57.171,93.479 JA3.1
  L4 [Power] w0.3: v1(49.1,100.4) 53.425,100.4 54.975,98.85 54.975,94.05 55.796,93.229 JA3.1@57.386,93.229
NetDA1_1: DA1.1 RA08.1 | length 3.5
  L1 [Signal] w0.25: RA08.1@45.461,94.025 44.696,94.025 44.55,94.171 44.55,95.679 44.696,95.825 DA1.1
NetDA1_2: DA1.2 pad.6@47.25,98.225 RA07.2 | length 13.4
  L1 [Signal] w0.25: DA1.2 48,94.825 50.6,94.825 50.984,95.209 RA07.2@50.984,96.2 ; pad.6@47.25,98.225 48.45,98.225 v3(48.475,98.25) ; RA07.2@50.911,96.211 50.911,96.311 51.175,96.575 51.275,96.575 51.95,97.25 v3(52.525,97.25)
  L4 [Power] w0.25: v3(48.475,98.25) 50.644,98.25 51.577,97.317 52.458,97.317 v3(52.525,97.25)
NetDA2_1: DA2.1 RA11.1 | length 2.3
  L1 [Signal] w0.3: DA2.1 50.8,92.075 51.025,91.85 RA11.1 RA11.1@51.675,91.875
NetDA2_2: DA2.2 JA3.2 | length 7.2
  L1 [Signal] w0.3: DA2.2 52.45,93.525 52.85,93.525 57.375,98.05 JA3.2
NetFB1_1: FB1.1 UB2.5 UB2.6 | length 5.6
  L1 [Signal] w0.3: UB2.5 61.851,106.8 61.675,106.624 61.675,106.026 61.851,105.85 UB2.6 62.925,105.725 FB1.1
NetFB1_2: FB1.2 JB6.A9 JB6.B9 | length 28.9
  L1 [Signal] w0.3: FB1.2 62.925,98.576 63.101,98.4 69.825,98.4 71.132,97.093 71.177,97.093 JB6.A9@71.65,96.62 ; JB6.B9 71.74,93.45 65.451,93.45 65.275,93.626 65.275,96.2 65.695,96.62 JB6.A9@71.65,96.62 ; JB6.A9 JB6.A9@71.65,96.62
NetJA1_1: JA1.1 JA2.A4-B9 JA2.A9-B4 PA1.6 pad.2@33.906,109.959 Q1.2 | length 60.1
  L1 [Signal] w0.25: 33.134,109.959 pad.2@33.906,109.959
  L1 [Signal] w0.3: 32.475,109.758 32.676,109.959 33.134,109.959 ; JA2.A9-B4@37.275,118.475 JA2.A9-B4 ; JA2.A4-B9 JA2.A4-B9@42.113,118.487 ; v4@42.113,117.088 v4(42.125,117.075)
  L1 [Signal] w0.4: 32.475,108.75 32.475,109.758
  L1 [Signal] w0.5: v7(30.425,107.775) 30.633,107.775 31.33,108.472 32.197,108.472 32.475,108.75 ; v4(36.6,116.975) 36.6,117.083 37.25,117.733 37.25,118.45 JA2.A9-B4@37.275,118.475 ; v4@42.113,117.088 JA2.A4-B9@42.113,118.487 ; v6(42.775,91.975) 42.8,92 42.8,93.33 Q1.2
  L4 [Power] w0.3: v4@42.112,117.062 v4(42.125,117.075)
  L4 [Power] w0.5: v7(30.425,107.775) 30.425,111.85 35.55,116.975 v4(36.6,116.975) 36.65,117.025 40.475,117.025 ; v4@42.112,117.062 42.075,117.025 40.475,117.025 ; v6(42.775,91.975) 40.475,94.275 40.475,108.6 ; JA1.1 40.475,108.6 ; 40.475,108.6 40.475,117.025
NetJB2_2: JB2.2 UB1.16 | length 7
  L1 [Signal] w0.3: UB1.16 70.55,121.575 JB2.2
NetJB3_2: JB3.2 UB1.8 | length 4.7
  L1 [Signal] w0.3: UB1.8 60.225,117.025 62.007,115.243 62.007,113.853 JB3.2
NetJB3_3: JB3.3 UB1.9 | length 4.4
  L1 [Signal] w0.3: JB3.3 63.583,113.853 63.583,115.108 65.009,116.534 65.009,116.95 65.084,117.025 UB1.9
NetJB6_A5: JB6.A5 RB2.2 | length 2.3
  L1 [Signal] w0.3: RB2.2@69.675,94.45 69.7,94.45 69.85,94.6 JB6.A5
NetJB6_B5: JB6.B5 RB1.2 | length 2.3
  L1 [Signal] w0.3: RB1.2@69.642,95.665 71.805,95.665 JB6.B5
NetPA1_1: PA1.1 pad.5@35.067,108.548 RA03.2 | length 11.8
  L1 [Signal] w0.25: PA1.1 33.375,100.538 34.637,100.538 v2(34.675,100.575) ; v2(33.9,106.7) 33.99,106.7 34.553,107.264 ; RA03.2 34.532,105.893 34.532,107.242 34.553,107.264 ; pad.5@35.067,108.548 35.067,107.777 34.553,107.264
  L4 [Power] w0.25: v2(33.9,106.7) 33.9,101.35 v2(34.675,100.575)
NetPA1_2: PA1.2 pad.6@35.567,108.548 RA02.2 | length 13.6
  L1 [Signal] w0.25: PA1.2 33.35,99.513 34.863,99.513 v2(34.875,99.525) ; v2(35.325,106.65) 35.325,106.7 35.788,107.163 ; pad.6@35.567,108.548 35.567,107.383 35.788,107.163 ; RA02.2@36.225,105.725 36.225,106.725 35.788,107.163
  L4 [Power] w0.25: v2(34.875,99.525) 35.5,99.525 35.975,100 35.975,105.979 35.325,106.629 v2(35.325,106.65)
NetPA1_3: PA1.3 pad.7@36.067,108.548 RA01.2 | length 16.4
  L1 [Signal] w0.25: PA1.3 33.35,98.513 35.038,98.513 v2(35.05,98.525) ; pad.7@36.067,108.548 36.069,108.546 36.069,107.756 36.6,107.225 37.575,107.225 37.9,106.9 RA01.2@37.9,105.65 ; v2(37,106.65) 37,106.675 37.525,107.2
  L4 [Power] w0.25: v2(35.05,98.525) 36.375,98.525 37,99.15 v2(37,106.65)
NetQ1_3: pad.3@45.29,98.224 pad.4@45.29,97.724 Q1.3 RA04.2 | length 7.9
  L1 [Signal] w0.25: 43.7,96.275 43.7,96.8 44.225,97.325 44.475,97.575 ; pad.4@45.29,97.724 44.624,97.724 44.475,97.575 ; pad.3@45.29,98.224 44.543,98.224 44.475,98.156 44.475,97.575
  L1 [Signal] w0.3: 42.25,96.275 43.7,96.275 ; RA04.2@42.695,97.325 44.225,97.325
  L1 [Signal] w0.4: Q1.3@41.875,95.4 41.875,95.9 42.25,96.275
NetRA04_1: pad.2@45.29,98.724 RA04.1 RA05.2 | length 7.7
  L1 [Signal] w0.25: RA04.1@41.656,97.225 40.946,97.225 40.8,97.371 40.8,97.775 41.2,98.175 43.2,98.175 43.476,98.451 43.476,98.724 ; RA05.2@42.35,99.175 43.025,99.175 43.476,98.724 ; pad.2@45.29,98.724 43.476,98.724
NetRA06_2: pad.7@47.26,98.724 RA06.2 | length 4
  L1 [Signal] w0.25: pad.7@47.26,98.724 47.849,98.724 48.225,99.1
  L1 [Signal] w0.3: 48.225,99.1 RA06.2
pads on no net: JA2.1 JA2.2 JA2.3 JA2.4 JA2.A6 JA2.A7 JA2.A8 JA2.B6 JA2.B7 JA2.B8 JB6.1 JB6.2 JB6.3 JB6.4 PA1.MP1 PA1.MP2 UB1.2 UB1.3 UB1.12 UB1.13 UB1.14 UB1.15 UB2.4
copper on no net:
  other v1: 57.7,119.075 57.8,120.475

## Polygon pours and split planes (outlines as drawn)
no net on L2 [GND] (split plane): 76.746,145.561 76.86,145.538 76.97,145.501 77.074,145.45 77.171,145.385 77.258,145.308 77.335,145.221 77.4,145.124 77.451,145.02 77.488,144.91 77.511,144.796 77.518,144.691 77.517,144.68 77.517,124.53 77.417,87.901 77.417,87.9 77.418,87.887 77.409,87.772 77.379,87.647 77.33,87.528 77.263,87.418 77.179,87.321 77.082,87.237 76.972,87.17 76.853,87.121 76.728,87.091 76.614,87.082 76.6,87.083 33.1,87.083 19.184,87.083 19.173,87.082 19.063,87.089 18.944,87.113 18.829,87.152 18.72,87.206 18.619,87.273 18.527,87.353 18.447,87.445 18.38,87.546 18.326,87.655 18.287,87.77 18.263,87.889 18.256,87.996 18.257,88.004 18.283,90.17 18.283,90.174 18.283,90.177 18.283,90.225 18.308,128.854 18.308,128.855 18.308,144.68 18.307,144.691 18.314,144.796 18.337,144.91 18.374,145.02 18.425,145.124 18.49,145.221 18.567,145.308 18.654,145.385 18.751,145.45 18.855,145.501 18.965,145.538 19.079,145.561 19.184,145.568 19.195,145.567 29.35,145.567 29.351,145.567 75.425,145.567 76.63,145.567 76.641,145.568
no net on L3 [GND] (split plane): 76.746,145.561 76.86,145.538 76.97,145.501 77.074,145.45 77.171,145.385 77.258,145.308 77.335,145.221 77.4,145.124 77.451,145.02 77.488,144.91 77.511,144.796 77.518,144.691 77.517,144.68 77.517,124.53 77.417,87.901 77.417,87.9 77.418,87.887 77.409,87.772 77.379,87.647 77.33,87.528 77.263,87.418 77.179,87.321 77.082,87.237 76.972,87.17 76.853,87.121 76.728,87.091 76.614,87.082 76.6,87.083 33.1,87.083 19.184,87.083 19.173,87.082 19.063,87.089 18.944,87.113 18.829,87.152 18.72,87.206 18.619,87.273 18.527,87.353 18.447,87.445 18.38,87.546 18.326,87.655 18.287,87.77 18.263,87.889 18.256,87.996 18.257,88.004 18.283,90.17 18.283,90.174 18.283,90.177 18.283,90.225 18.308,128.854 18.308,128.855 18.308,144.68 18.307,144.691 18.314,144.796 18.337,144.91 18.374,145.02 18.425,145.124 18.49,145.221 18.567,145.308 18.654,145.385 18.751,145.45 18.855,145.501 18.965,145.538 19.079,145.561 19.184,145.568 19.195,145.567 29.35,145.567 29.351,145.567 75.425,145.567 76.63,145.567 76.641,145.568

## Other copper
L1 [Signal]:
  region: 46.683,99.273 46.685,99.273 46.688,99.272 46.69,99.272 46.693,99.271 46.695,99.27 46.698,99.269 46.7,99.267 46.702,99.266 46.704,99.264 46.706,99.263 46.708,99.261 46.71,99.259 46.712,99.257 46.714,99.255 46.715,99.253 46.717,99.251 46.718,99.249 46.72,99.247 46.721,99.244 46.722,99.242 46.723,99.239 46.723,99.237 46.724,99.234 46.724,99.232 46.725,99.229 46.725,99.227 46.725,99.224 46.725,97.724 46.725,97.721 46.725,97.719 46.724,97.716 46.724,97.714 46.723,97.711 46.723,97.709 46.722,97.706 46.721,97.704 46.72,97.701 46.718,97.699 46.717,97.697 46.715,97.695 46.714,97.693 46.712,97.691 46.71,97.689 46.708,97.687 46.706,97.685 46.704,97.684 46.702,97.682 46.7,97.681 46.698,97.679 46.695,97.678 46.693,97.677 46.69,97.676 46.688,97.676 46.685,97.675 46.683,97.675 46.68,97.674 45.87,97.674 45.867,97.675 45.865,97.675 45.862,97.676 45.86,97.676 45.857,97.677 45.855,97.678 45.852,97.679 45.85,97.681 45.848,97.682 45.846,97.684 45.844,97.685 45.842,97.687 45.84,97.689 45.838,97.691 45.836,97.693 45.835,97.695 45.833,97.697 45.832,97.699 45.83,97.701 45.829,97.704 45.828,97.706 45.827,97.709 45.827,97.711 45.826,97.714 45.826,97.716 45.825,97.719 45.825,97.721 45.825,97.724 45.825,99.224 45.825,99.227 45.825,99.229 45.826,99.232 45.826,99.234 45.827,99.237 45.827,99.239 45.828,99.242 45.829,99.244 45.83,99.247 45.832,99.249 45.833,99.251 45.835,99.253 45.836,99.255 45.838,99.257 45.84,99.259 45.842,99.261 45.844,99.263 45.846,99.264 45.848,99.266 45.85,99.267 45.852,99.269 45.855,99.27 45.857,99.271 45.86,99.272 45.862,99.272 45.865,99.273 45.867,99.273 45.87,99.274 46.68,99.274

## Silkscreen, mask and mechanical layers (free items; w line width, h text height)
Top Overlay:
  circle w0.2: c44.29,99.924 r0.1
  region: 37.477,110.649 37.731,110.649 37.731,110.268 37.477,110.268
  lines w0.152: 33.945,108.587 33.945,108.999 ; 33.945,110.919 33.945,111.331 ; 36.689,108.587 36.689,108.999 ; 36.689,110.919 36.689,111.331
  text "BMS" at 59,122.9 h1
  text "PD Trigger" at 30.2,115.1 h1
  text "*" at 32.574,111.153 h1.27
  text "Jetson Protection" at 40.1,103.475 h1
Top Paste:
  drawing of 2 lines, arcs and shapes, not listed
Top Solder:
  drawing of 9 lines, arcs and shapes, not listed
Mechanical 1:
  lines w0.254: 17.9,90.175 17.874,88.01 ccw(c19.184,88.01) 19.184,86.7 33.1,86.7 ccw(c33.1,86.75) 33.15,86.75 ; 17.9,90.225 17.925,128.855 ; 27.45,145.95 75.425,145.95 76.63,145.95 cw(c76.63,144.68) 77.9,144.68 77.9,129.405 77.9,124.53 77.8,87.9 cw(c76.6,87.9) 76.6,86.7 32.1,86.7 29.22,86.7 ; 29.35,145.95 19.195,145.95 ccw(c19.195,144.68) 17.925,144.68 17.925,128.855 ; 17.925,128.855 ccw(c17.925,128.855) 17.925,128.855
Mechanical 13:
  circle w0.2: c44.29,99.924 r0.1
  lines w0.025: 34.072,109.934 35.342,111.204 ; 33.817,109.307 34.072,109.307 34.072,109.611 33.817,109.611 33.817,109.307 ; 33.817,109.807 33.817,110.111 34.072,110.111 34.072,109.807 33.817,109.807 ; 33.817,110.307 33.817,110.611 34.072,110.611 34.072,110.307 33.817,110.307 ; 34.072,108.714 36.562,108.714 36.562,111.204 34.072,111.204 34.072,108.714 ; 34.415,108.459 34.415,108.714 34.719,108.714 34.719,108.459 34.415,108.459 ; 34.415,111.204 34.415,111.459 34.719,111.459 34.719,111.204 34.415,111.204 ; 34.915,108.459 34.915,108.714 35.219,108.714 35.219,108.459 34.915,108.459 ; 34.915,111.204 35.219,111.204 35.219,111.459 34.915,111.459 34.915,111.204 ; 35.415,108.459 35.415,108.714 35.719,108.714 35.719,108.459 35.415,108.459 ; 35.415,111.204 35.415,111.459 35.719,111.459 35.719,111.204 35.415,111.204 ; 35.915,108.459 36.219,108.459 36.219,108.714 35.915,108.714 35.915,108.459 ; 35.915,111.204 36.219,111.204 36.219,111.459 35.915,111.459 35.915,111.204 ; 36.562,109.307 36.562,109.611 36.817,109.611 36.817,109.307 36.562,109.307 ; 36.562,109.807 36.562,110.111 36.817,110.111 36.817,109.807 36.562,109.807 ; 36.562,110.307 36.562,110.611 36.817,110.611 36.817,110.307 36.562,110.307
  lines w0.127: 45.275,97.474 45.275,99.474 47.275,99.474 47.275,97.474 45.275,97.474
  text "*" at 34.084,110.074 h1.27
Mechanical 15:
  region: 33.93,108.195 33.562,108.195 33.562,108.812 32.901,108.812 32.901,111.082 33.562,111.082 33.562,111.7 33.93,111.7 33.93,112.362 36.7,112.362 36.7,111.7 37.068,111.7 37.068,111.082 37.729,111.082 37.729,108.812 37.068,108.812 37.068,108.195 36.7,108.195 36.7,107.533 33.93,107.533
  lines w0.05: 44.79,97.224 47.76,97.224 47.76,99.724 44.79,99.724 44.79,97.224
  lines w0.152: 32.903,108.824 32.903,111.094 33.564,111.094 33.564,111.712 33.932,111.712 33.932,112.373 36.702,112.373 36.702,111.712 37.07,111.712 37.07,111.094 37.731,111.094 37.731,108.824 37.07,108.824 37.07,108.206 36.702,108.206 36.702,107.545 33.932,107.545 33.932,108.206 33.564,108.206 33.564,108.824 32.903,108.824